# EAGLE board SIDEPANEL3.2 (EAGLE 7.6.0)
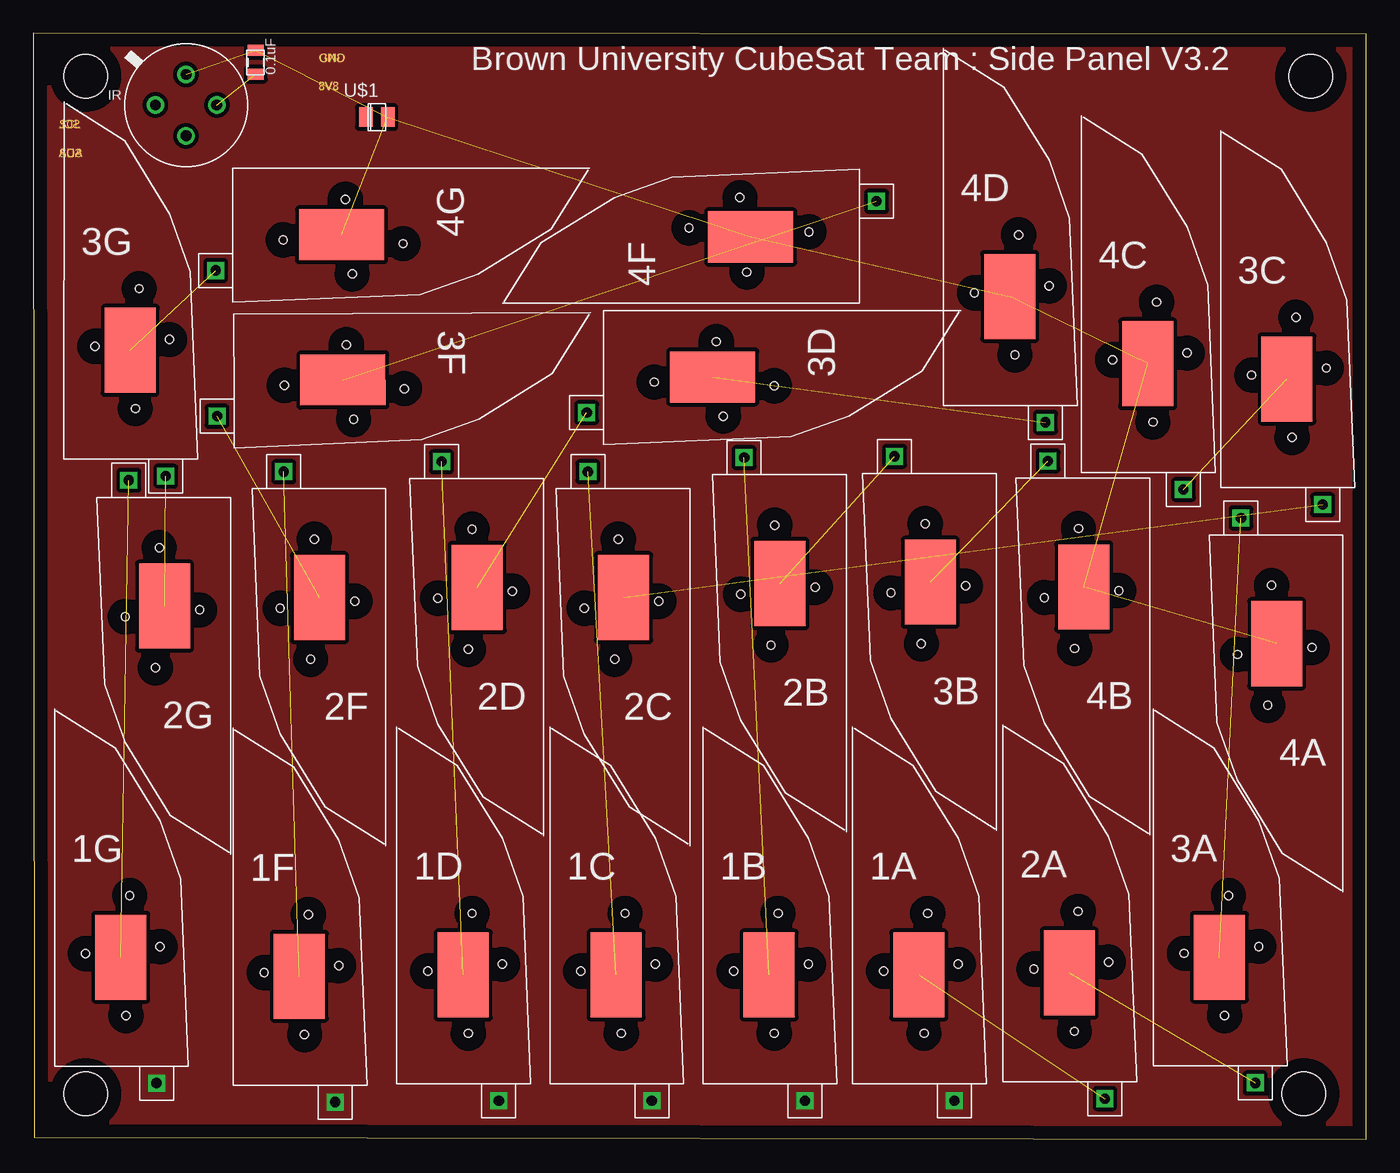
[diagram p0: board, top side]
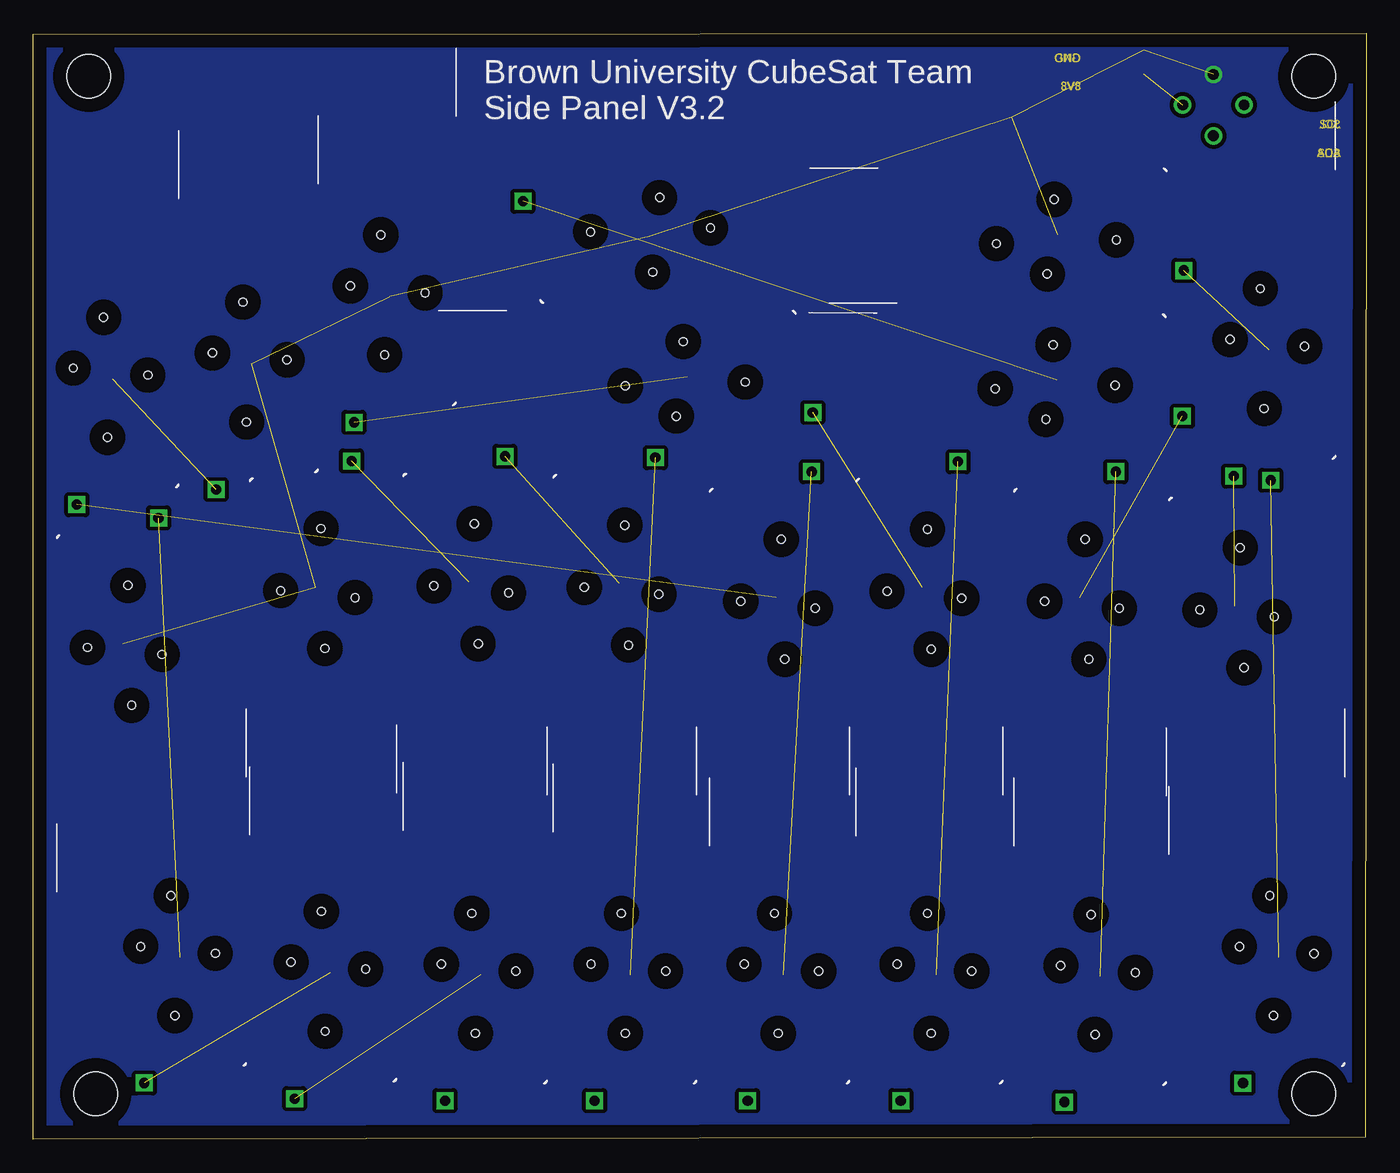
[diagram p1: board, bottom side, seen from below]

Size 99.54 x 82.62 mm. Coordinates in mm from the lower left corner, seen from the top.
Outline: 0.05,0.15 99.54,0 99.54,82.57 0,82.62 0.05,0.15
Copper layers (1*16): Top 0.035mm / dielectric 1.5mm / Bottom 0.035mm
Design rules "default": minimum track width 10mil, minimum drill 24mil, track to track 8mil, track to pad 8mil, pad to pad 8mil, via to via 8mil, smd to smd 8mil, copper to edge 40mil, drill to drill 8mil, minimum pad ring 10mil, minimum via ring 8mil, stop-mask expansion 4mil, vias tented up to drill 0mil, thermal gap 10mil
Holes 3.26 mm at 3.9,79.42 3.9,3.42 94.9,3.42 95.4,79.42

## Footprints (pad centres in the part's own frame; a part is rotated, then mirrored left to right if it is on the bottom)
SOLARCELL2 = drill 0.76 square: ANODE 7.62,-1.27 | smd 3.81 x 6.35: CATHODE 4.953,8.128 | hole 0.6: 2.32,8.41; 5.62,12.73; 7.89,8.93; 5.34,3.77
0805 = smd 0.8 x 1.2: 1 -0.9,0; 2 0.9,0
MXL90614 = drill 0.8: SCL 2.293,0; VDD -2.293,0; VSS 0,-2.294 | drill 0.8 pad 1.2: SDA 0,2.294
PHOTODECTORDEVICE2 = smd 1 x 1.45: GND 0.76,0.4; PWROUT -0.88,0.4

## Placement (x,y rotation side)
1A  NEWSOLARPANEL  [SOLARCELL2]  61.18,4.16 0 top
1B  NEWSOLARPANEL  [SOLARCELL2]  50,4.16 0 top
1C  NEWSOLARPANEL  [SOLARCELL2]  38.57,4.16 0 top
1D  NEWSOLARPANEL  [SOLARCELL2]  27.14,4.16 0 top
1F  NEWSOLARPANEL  [SOLARCELL2]  14.91,4.06 0 top
1G  NEWSOLARPANEL  [SOLARCELL2]  1.57,5.48 0 top
2A  NEWSOLARPANEL  [SOLARCELL2]  72.41,4.31 0 top
2B  NEWSOLARPANEL  [SOLARCELL2]  60.71,49.66 180 top
2C  NEWSOLARPANEL  [SOLARCELL2]  49.03,48.61 180 top
2D  NEWSOLARPANEL  [SOLARCELL2]  38.1,49.36 180 top
2F  NEWSOLARPANEL  [SOLARCELL2]  26.32,48.61 180 top
2G  NEWSOLARPANEL  [SOLARCELL2]  14.74,47.97 180 top
3A  NEWSOLARPANEL  [SOLARCELL2]  83.64,5.49 0 top
3B  NEWSOLARPANEL  [SOLARCELL2]  71.94,49.76 180 top
3C  NEWSOLARPANEL  [SOLARCELL2]  88.68,48.69 0 top
3D  NEWSOLARPANEL  [SOLARCELL2]  42.6,61.92 270 top
3F  NEWSOLARPANEL  [SOLARCELL2]  14.96,61.66 270.2 top
3G  NEWSOLARPANEL  [SOLARCELL2]  2.26,50.84 359.9 top
4A  NEWSOLARPANEL  [SOLARCELL2]  97.82,45.16 180 top
4B  NEWSOLARPANEL  [SOLARCELL2]  83.4,49.41 180 top
4C  NEWSOLARPANEL  [SOLARCELL2]  78.28,49.82 0 top
4D  NEWSOLARPANEL  [SOLARCELL2]  67.97,54.84 0 top
4F  NEWSOLARPANEL  [SOLARCELL2]  61.7,62.47 90 top
4G  NEWSOLARPANEL  [SOLARCELL2]  14.88,72.54 270 top
C1  0.1uF  [0805]  16.6,80.47 270 top
IR  MXL90620  [MXL90614]  11.4,77.27 180 top
U$1  PHOTODETECTOR  [PHOTODECTORDEVICE2]  25.7,75.97 0 top

## Library data of the parts
1A 1B 1C 1D 1F 1G 2A 2B 2C 2D 2F 2G 3A 3B 3C 3D 3F 3G 4A 4B 4C 4D 4F 4G U$1 = solarcellnew
C1 IR = CNTRL_BOARD

## Nets
3V3: C1.2 IR.VDD
GND: 4A.CATHODE 4B.CATHODE 4C.CATHODE 4D.CATHODE 4F.CATHODE 4G.CATHODE C1.1 IR.VSS U$1.GND
N$1: 2A.CATHODE 3A.ANODE
N$2: 1C.CATHODE 2C.ANODE
N$3: 2B.CATHODE 3B.ANODE
N$4: 2C.CATHODE 3C.ANODE
N$5: 2D.CATHODE 3D.ANODE
N$6: 3C.CATHODE 4C.ANODE
N$8: 2F.CATHODE 3F.ANODE
N$9: 1B.CATHODE 2B.ANODE
N$10: 2G.CATHODE 3G.ANODE
N$11: 3G.CATHODE 4G.ANODE
N$12: 1D.CATHODE 2D.ANODE
N$13: 3F.CATHODE 4F.ANODE
N$15: 3D.CATHODE 4D.ANODE
N$16: 3B.CATHODE 4B.ANODE
N$17: 3A.CATHODE 4A.ANODE
N$18: 1A.CATHODE 2A.ANODE
N$24: 1G.CATHODE 2G.ANODE
N$32: 1F.CATHODE 2F.ANODE
PDOUT: U$1.PWROUT
PWR: 1A.ANODE 1B.ANODE 1C.ANODE 1D.ANODE 1F.ANODE 1G.ANODE
SCL: IR.SCL
SDA: IR.SDA

## Tracks (layer width: path | path; a pad name or v marks a point on that pad's centre or on a via)
3V3  (1 unrouted)
GND  (8 unrouted)
  pour Bottom (isolate 0.305, no thermals): -5.25,85.12 104.3,85.12 104.3,-4.83 -5.25,-4.83
N$1  (1 unrouted)
N$2  (1 unrouted)
N$3  (1 unrouted)
N$4  (1 unrouted)
N$5  (1 unrouted)
N$6  (1 unrouted)
N$8  (1 unrouted)
N$9  (1 unrouted)
N$10  (1 unrouted)
N$11  (1 unrouted)
N$12  (1 unrouted)
N$13  (1 unrouted)
N$15  (1 unrouted)
N$16  (1 unrouted)
N$17  (1 unrouted)
N$18  (1 unrouted)
N$24  (1 unrouted)
N$32  (1 unrouted)
PWR
  pour Top (isolate 0.305, no thermals): -4.75,85.22 104.45,85.22 104.45,-3.88 -4.75,-3.88

## Text on the board
Dimension: +Y | GND | GND | 3V3 | 3V3 | SCL | SCL | SDA | SDA
tPlace: Brown University CubeSat Team : Side Panel V3.2
bPlace: Brown University CubeSat Team / Side Panel V3.2
Document: PD OUT | PD OUT | PWR OUT | PWR OUT